# EAGLE board benchtop power supply-v12 (EAGLE 6.5.0)
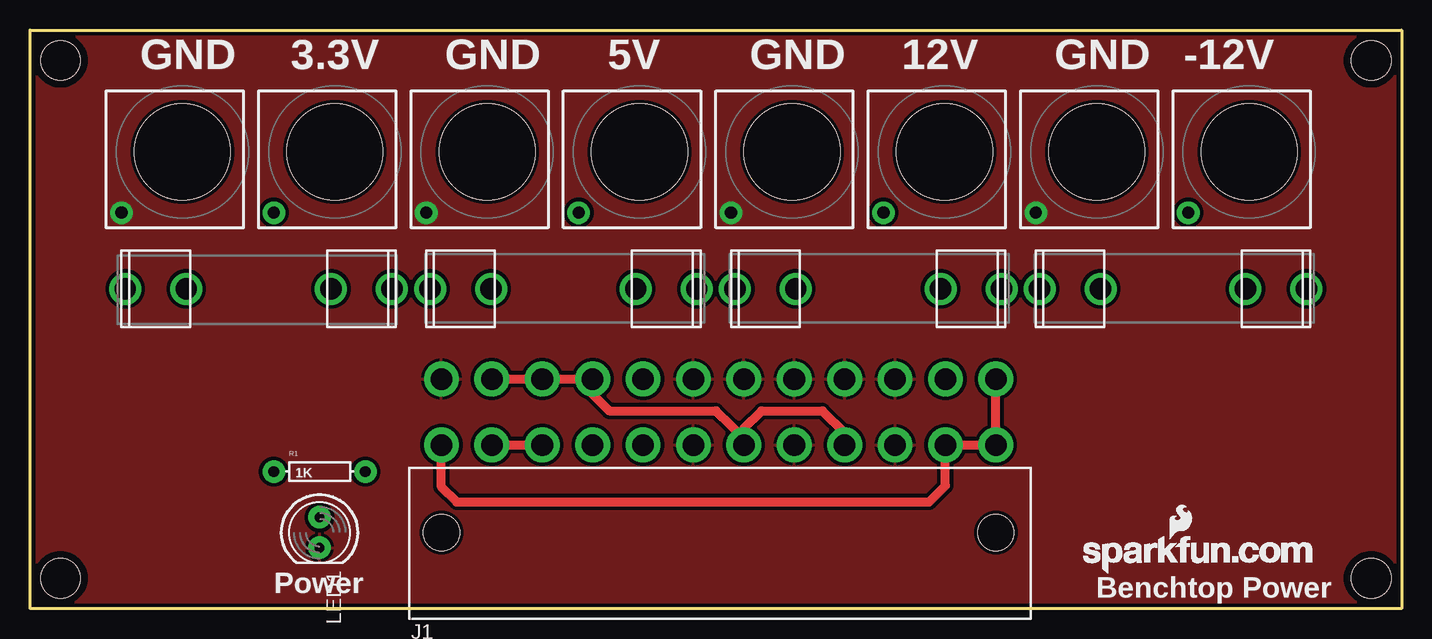
[diagram p0: board, top side]
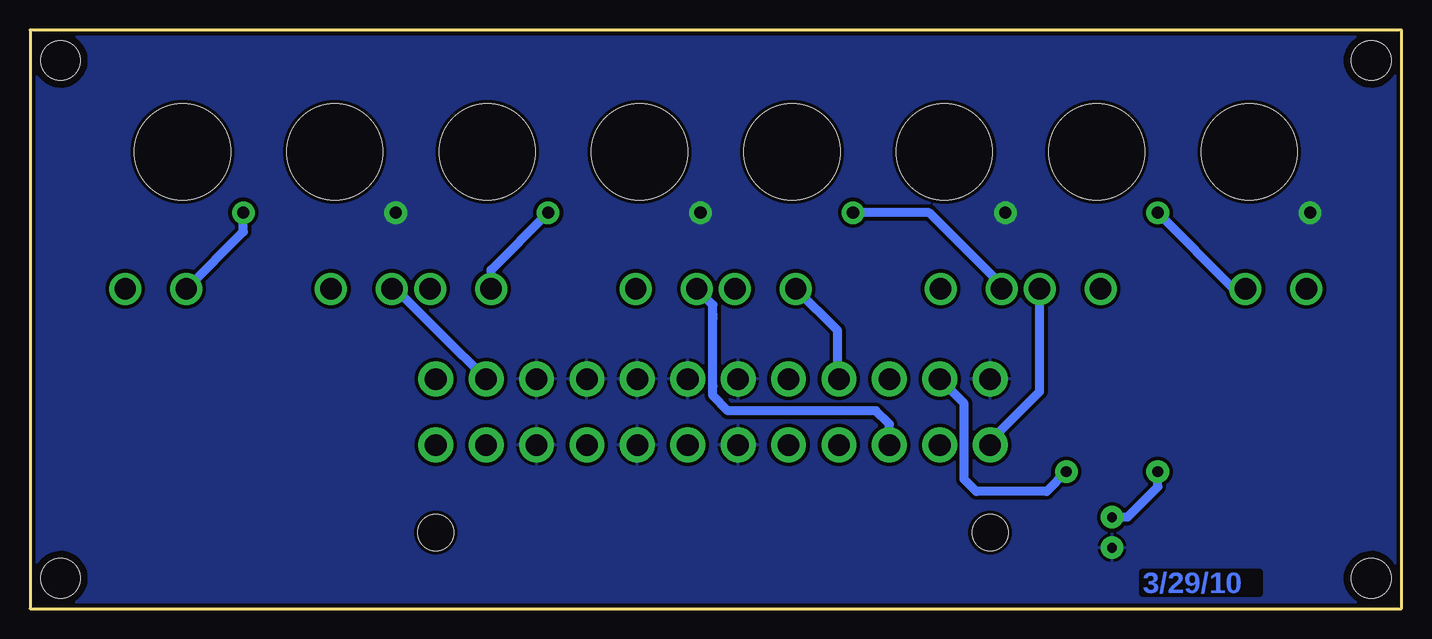
[diagram p1: board, bottom side, seen from below]

Size 114.3 x 48.26 mm. Coordinates in mm from the lower left corner, seen from the top.
Outline: 0,0 0,48.26 114.3,48.26 114.3,0 0,0
Copper layers (1*16): Top 0.035mm / dielectric 1.5mm / Bottom 0.035mm
Design rules "SparkFun": minimum track width 8mil, minimum drill 20mil, track to track 8mil, track to pad 8mil, pad to pad 8mil, via to via 8mil, smd to smd 8mil, copper to edge 8mil, drill to drill 8mil, minimum pad ring 12mil, minimum via ring 10mil, stop-mask expansion 4mil, vias tented up to drill 20mil, thermal gap 10mil

## Footprints (pad centres in the part's own frame; a part is rotated, then mirrored left to right if it is on the bottom)
FUSE_5MM = drill 1.778: 1 0,-11.113; 2 0,-6.032; 3 0,6.032; 4 0,11.113
ATX24_RIGHT_ANGLE = drill 1.8 pad 2.9: 1 23.34,4.76; 2 19.14,4.76; 3 14.94,4.76; 4 10.74,4.76; 5 6.54,4.76; 6 2.34,4.76; 7 -1.86,4.76; 8 -6.06,4.76; 9 -10.26,4.76; 10 -14.46,4.76; 11 -18.66,4.76; 12 -22.86,4.76; 13 23.34,10.26; 14 19.14,10.26; 15 14.94,10.26; 16 10.74,10.26; 17 6.54,10.26; 18 2.34,10.26; 19 -1.86,10.26; 20 -6.06,10.26; 21 -10.26,10.26; 22 -14.46,10.26; 23 -18.66,10.26; 24 -22.86,10.26 | hole 3: -22.86,-2.54; 23.34,-2.54
STAND-OFF = hole 3.302: 0,0
LED5MM = drill 0.813 pad 1.88: A -1.27,0; K 1.27,0
AXIAL-0.3 = drill 0.9 pad 1.88: P$1 -3.81,0; P$2 3.81,0
BINDING_POST = hole 8: 0,0

## Placement (x,y rotation side)
F1  FUSEX20MM  [FUSE_5MM]  44.45,26.67 270 top
F2  FUSEX20MM  [FUSE_5MM]  19.05,26.67 90 top
F3  FUSEX20MM  [FUSE_5MM]  69.85,26.67 270 top
F4  FUSEX20MM  [FUSE_5MM]  95.25,26.67 270 top
J1  ATX24RH  [ATX24_RIGHT_ANGLE]  57.15,8.89 0 top
JP1  LOGO-SFENEW  [SFE-NEW-WEBLOGO]  87.76,2.92 0 top
JP2  STAND-OFF  [STAND-OFF]  111.76,2.54 0 top
JP3  STAND-OFF  [STAND-OFF]  111.76,45.72 0 top
JP4  STAND-OFF  [STAND-OFF]  2.54,2.54 0 top
JP5  STAND-OFF  [STAND-OFF]  2.54,45.72 0 top
LED1  RED  [LED5MM]  24.13,6.35 270 top
R1  1K  [AXIAL-0.3]  24.13,11.43 0 top
S1  BINDING_POST  [BINDING_POST]  12.7,38.1 90 top
S2  BINDING_POST  [BINDING_POST]  25.4,38.1 90 top
S3  BINDING_POST  [BINDING_POST]  38.1,38.1 90 top
S4  BINDING_POST  [BINDING_POST]  50.8,38.1 90 top
S5  BINDING_POST  [BINDING_POST]  63.5,38.1 90 top
S6  BINDING_POST  [BINDING_POST]  76.2,38.1 90 top
S7  BINDING_POST  [BINDING_POST]  88.9,38.1 90 top
S8  BINDING_POST  [BINDING_POST]  101.6,38.1 90 top

## Library data of the parts
F1-F4 J1 JP1-JP5 LED1 R1 S1-S8 = SparkFun

## Nets
3.3V: F2.1 J1.1 J1.2 J1.12 J1.13
3.3V_P: F2.3
5V: F1.3 J1.4 J1.6 J1.21 J1.22 J1.23 R1.P$2
5V_P: F1.1
12V: F3.1 J1.10 J1.11
12V_P: F3.3
-12V: F4.1 J1.14
-12V_P: F4.3
GND: J1.3 J1.5 J1.7 J1.15 J1.16 J1.17 J1.18 J1.19 J1.24 LED1.K
N$1: LED1.A R1.P$1

## Tracks (layer width: path | path; a pad name or v marks a point on that pad's centre or on a via)
3.3V
  Top 0.762: 80.52,13.59 80.49,13.62 | 80.49,13.62 J1.1 | 80.49,13.62 J1.1 | J1.1 J1.13 | 80.52,13.59 80.49,13.62 | 80.52,13.59 80.49,13.62 | 80.49,13.62 J1.1 | 80.52,13.59 80.46,13.65 J1.2 76.29,10.25 74.93,8.89 35.56,8.89 34.29,10.16 J1.12
  Bottom 0.762: J1.12 34.29,13.97 30.16,18.1 F2.1
3.3V_P  (via drill 1.02 pad 1.88)
  Bottom 0.762: F2.3 13.97,26.67 v20.32,33.02
5V
  Top 0.762: 42.77,19.15 42.8,19.18 42.77,19.15 | J1.22 42.77,19.15 | J1.23 J1.22 | J1.22 42.77,19.15 | J1.22 43.03,19.15 43.05,19.18 43.08,19.15 J1.21 46.89,17.88 48.26,16.51 57.15,16.51 58.42,15.24 59.49,14.17 J1.6 59.49,15.04 60.96,16.51 66.04,16.51 67.89,14.66 J1.4
  Bottom 0.762: J1.23 36.45,17.11 36.45,13.08 36.45,10.79 35.43,9.78 29.59,9.78 R1.P$2 | J1.21 46.99,19.05 46.99,23.18 F1.3
5V_P  (via drill 1.02 pad 1.88)
  Bottom 0.762: v45.72,33.02 39.37,33.02 33.34,26.99 F1.1
12V
  Top 0.762: 42.73,13.65 42.8,13.72 42.73,13.65 | 42.73,13.65 J1.10 | J1.11 42.73,13.65
  Bottom 0.762: J1.10 42.69,15.38 42.8,15.49 43.81,16.51 56.13,16.51 57.4,17.78 57.4,18.54 57.4,24.22 57.4,24.51 57.4,25.34 F3.1
12V_P  (via drill 1.02 pad 1.88)
  Bottom 0.762: F3.3 75.88,28.26 v71.12,33.02
-12V
  Bottom 0.762: J1.14 80.01,22.86 83.82,26.67 F4.1
-12V_P  (via drill 1.02 pad 1.88)
  Bottom 0.762: F4.3 96.52,31.43 v96.52,33.02
GND  (via drill 1.02 pad 1.88)
  other vias: 7.62,33.02 33.02,33.02 58.42,33.02 83.82,33.02
  pour Bottom (isolate 0.305): 0,0 0,48.26 114.3,48.26 114.3,0
  pour Top (isolate 0.305): 0,0 0,48.26 114.3,48.26 114.3,0
N$1
  Bottom 0.762: R1.P$1 20.32,10.16 21.59,8.89 22.86,7.62 LED1.A

## Text on the board
Bottom: 3/29/10
tPlace: GND | 3.3V | GND | 5V | GND | 12V | GND | -12V | Benchtop Power | Power